# Altium PCB MAX3738ETG+ MEZ.PcbDoc
Units mm, origin at the board's own origin, x right, y up, seen from the top; angles counter-clockwise.
Board outline 80 x 55 mm, 2 copper layers (Top Layer, Bottom Layer); 14 components, 22 nets, 73 pads, 3 vias.
Unrouted connection lines stored in the file: 2.
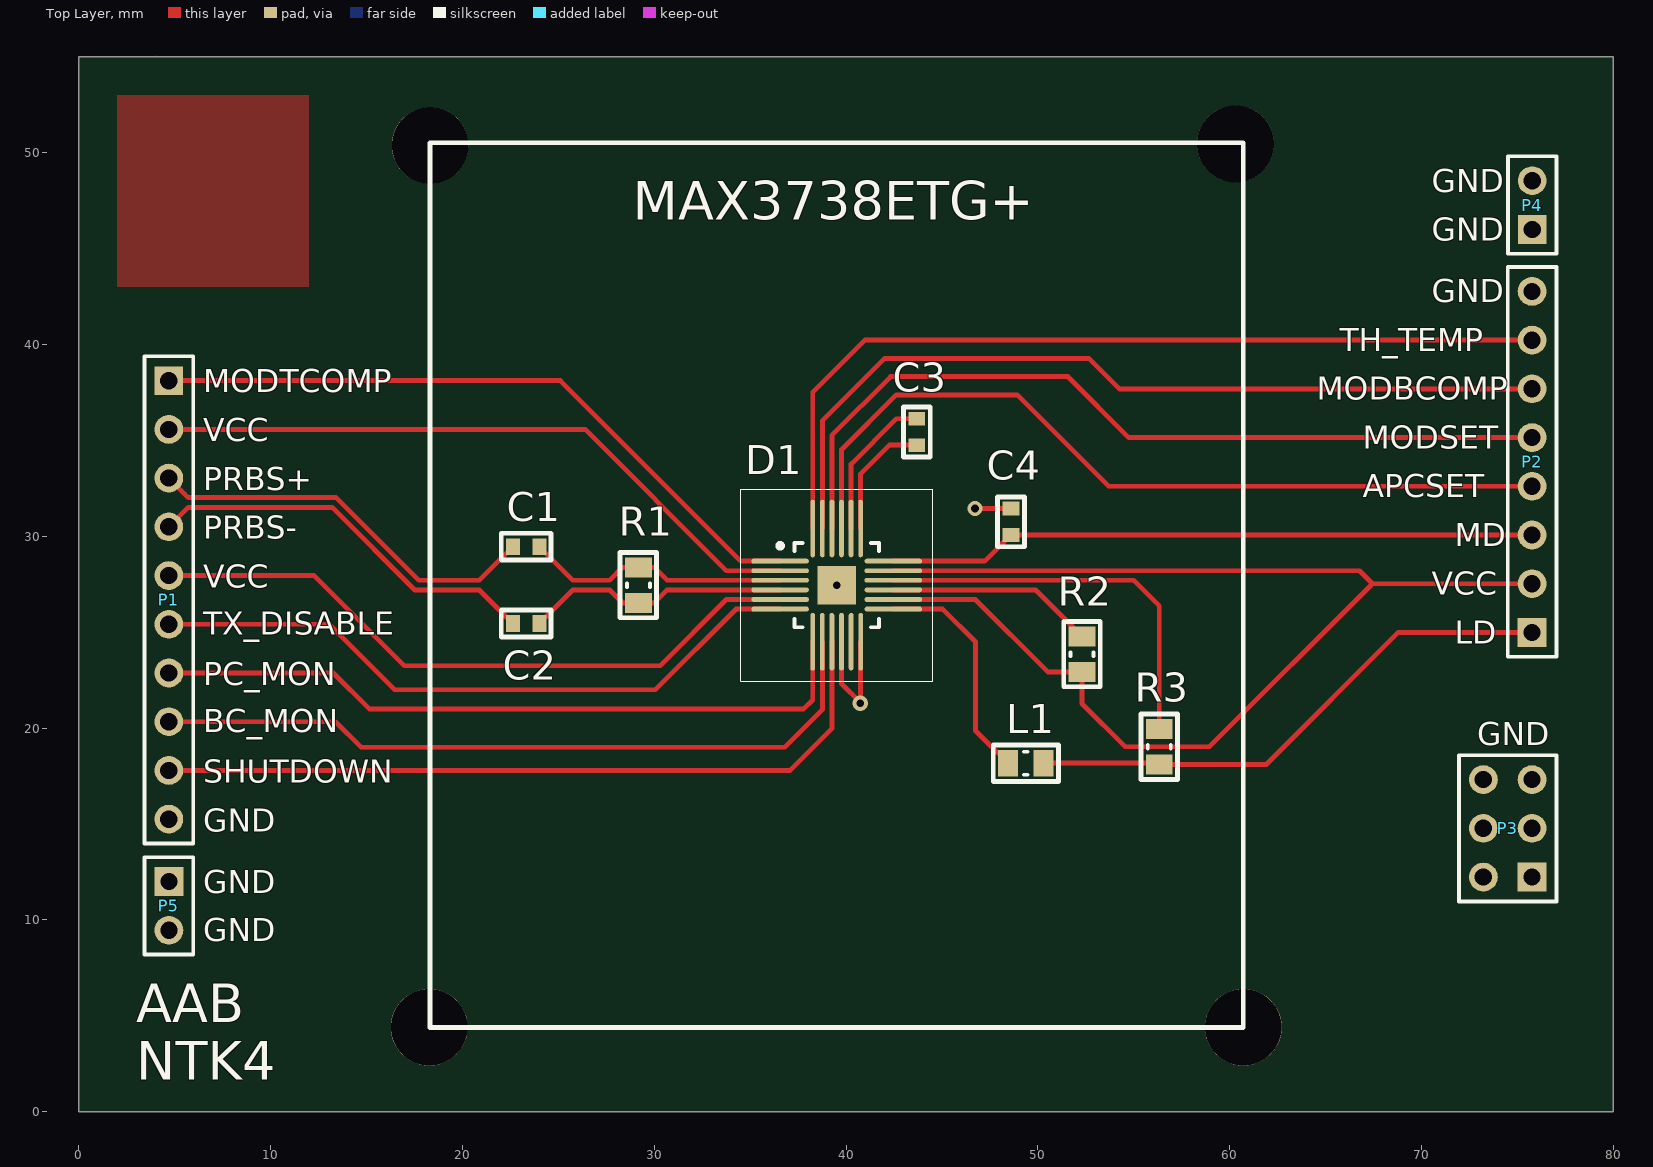
[diagram p0: Top Layer view]
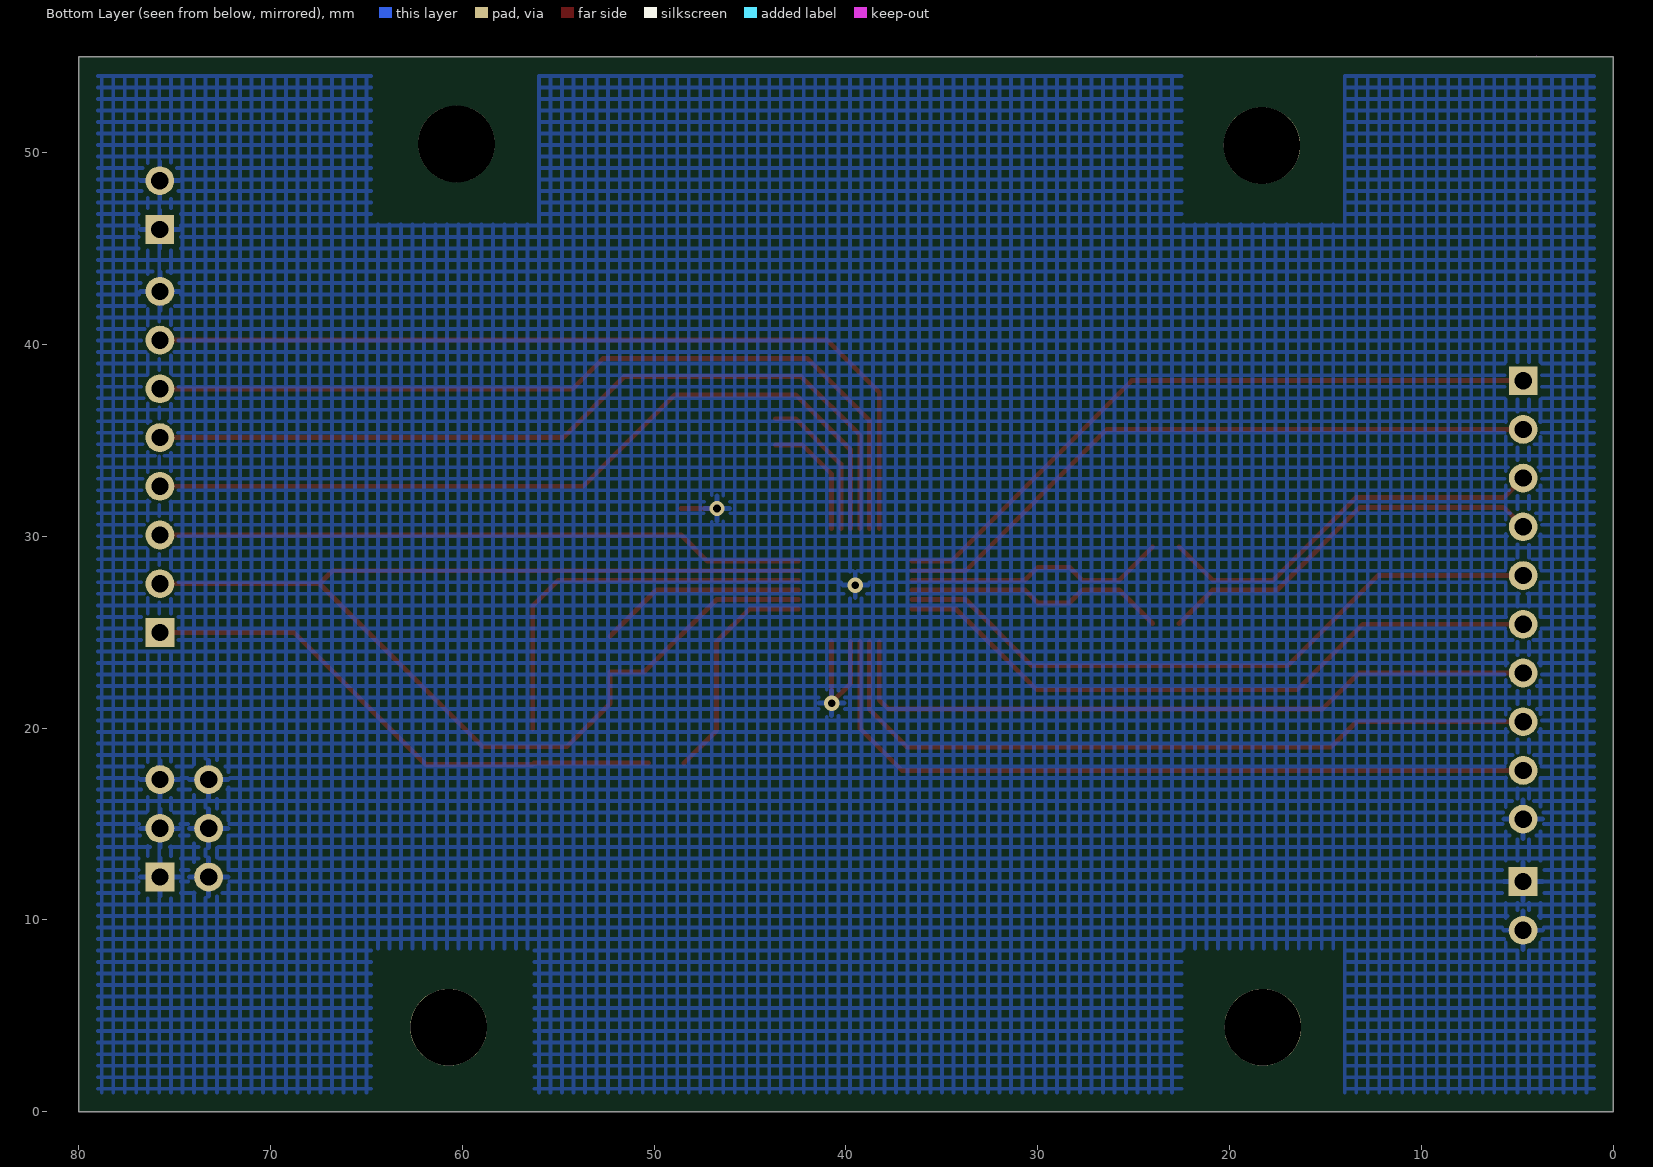
[diagram p1: Bottom Layer view, seen from below]

## Layer stack, top to bottom
Top Solder: solder mask 0.0102, Solder Resist, Dk 3.5
Top Layer: signal copper 0.0356
Dielectric 1: dielectric 0.32, FR-4, Dk 4.8
Bottom Layer: signal copper 0.0356
Bottom Solder: solder mask 0.0102, Solder Resist, Dk 3.5

## Board outline
0,0 80,0 80,55 0,55
cut-out: 4.025,55.075

## Design rules (kind name [scope] priority, off if disabled: settings)
Clearance [All] p1: gap=0.127 ignorepadtopadclearanceinfootprint=FALSE
DiffPairsRouting [All] p1: maxlimit=0.254 minlimit=0.254 mostfreqgap=0.254 toplayer_minwidth=0.254 toplayer_maxwidth=0.254 toplayer_prefwidth=0.254 bottomlayer_minwidth=0.254 bottomlayer_maxwidth=0.254 bottomlayer_prefwidth=0.254 maxuncoupledlength=12.7
PolygonConnect [All] p1: connectstyle=Relief reliefconductorwidth=0.254 reliefentries=4 polygonreliefangle="90 Angle" airgapwidth=0.254
RoutingVias [All] p1: holewidth=0.4 width=0.8 viastyle="Through Hole" minholewidth=0.4 minwidth=0.6 maxholewidth=6 maxwidth=6
SolderMaskExpansion [All] p1: expansion=0.102
UnRoutedNet [All] p1: checkbadconnections=TRUE
Width [All] p1: maxlimit=0.6 minlimit=0.127 preferedwidth=0.254 minimp=50.000000 maximp=50.000000 favimp=50.000000 checkconnectedcopper=TRUE
28 further rules are at their usual default settings.

## Classes and differential pairs
differential pair PRBS: +PRBS_P -PRBS_N
differential pair IN: +IN_P -IN_N

## Components (designator, comment, footprint, x,y, rotation, side; value= is the part's Value field where it differs from the comment)
C1 "0,1 uF_0603" CAP_0603 23.325,29.455 r0 top
C2 "0,1 uF_0603" CAP_0603 23.325,25.455 r0 top
C3 "0,01uF_0603" CAP_0603 43.691,35.439 r90 top
C4 "0,01uF_0603" CAP_0603 48.598,30.758 r90 top
D1 "MAX3738ETG+" MAX3738ETG+ 39.515,27.455 r0 top
L1 "4,7 uH_0805" IND_0805 49.376,18.171 r0 top
P1 "Header 10" HDR1X10 4.697,38.113 r270 top
P2 "Header 8" HDR1X8 75.77,24.987 r90 top
P3 "Header 3X2A" HDR2X3_CEN 75.769,12.234 r90 top
P4 "Header 2" HDR1X2 75.775,46 r90 top
P5 "Header 2" HDR1X2 4.7,12 r270 top
R1 "100 Om_0805" RES_0805 29.175,27.455 r90 top
R2 "15 Om_0805" RES_0805 52.304,23.857 r90 top
R3 "10 Om_0805" RES_0805 56.329,19.029 r90 top

## Footprints (in the part's own frame and the unit in brackets; to place one, negate y for a bottom-side part, rotate by r counter-clockwise, add the part's x,y. Pads: shape width x height; smd on the part's side, far side on the other; paste and mask are expansions set on the pad)
CAP_0603 [mm]
  rect 0.72x0.88 smd: 1(-0.69,0) 2(0.69,0)
  silkscreen extent -1.3,-0.7 1.3,0.7, body extent -0.8,-0.4 0.8,0.4, height 0.9
HDR1X2 [mm] "Connector; Header; 2 Position"
  rect 1.5x1.5 hole 0.9: 1(0,0)
  round 1.5 hole 0.9: 2(2.54,0)
  silkscreen extent -1.27,-1.27 3.81,1.27
HDR1X8 [mm] "Connector; Header; 8 Position"
  rect 1.5x1.5 hole 0.9: 1(0,0)
  round 1.5 hole 0.9: 2(2.54,0) 3(5.08,0) 4(7.62,0) 5(10.16,0) 6(12.7,0) 7(15.24,0) 8(17.78,0)
  silkscreen extent -1.27,-1.27 19.05,1.27
HDR1X10 [mm] "Connector; Header; 10 Position"
  rect 1.5x1.5 hole 0.9: 1(0,0)
  round 1.5 hole 0.9: 2(2.54,0) 3(5.08,0) 4(7.62,0) 5(10.16,0) 6(12.7,0) 7(15.24,0) 8(17.78,0) 9(20.32,0) 10(22.86,0)
  silkscreen extent -1.27,-1.27 24.13,1.27
HDR2X3_CEN [mm] "Connector; Header; 3x2 Position"
  rect 1.5x1.5 hole 0.9: 1(0,0)
  round 1.5 hole 0.9: 2(2.54,0) 3(5.08,0) 4(0,2.54) 5(2.54,2.54) 6(5.08,2.54)
  silkscreen extent -1.27,-1.27 6.35,3.81
IND_0805 [mm]
  rect 1.05x1.4 smd: 1(-0.925,0) 2(0.925,0)
  silkscreen extent -1.7,-0.95 1.7,0.95, body extent -1.1,-0.7 1.1,0.7, height 1
MAX3738ETG+ [mm] "QFN, 24-Leads, Body 4,00x4,00mm, Pitch 0,50mm, Thermal Pad 2,54x2,54mm, IPC Medium Density"
  oval 3x0.25 smd: 1(-2.95,1.25) 2(-2.95,0.75) 3(-2.95,0.25) 4(-2.95,-0.25) 5(-2.95,-0.75) 6(-2.95,-1.25) 13(2.95,-1.25) 14(2.95,-0.75) 15(2.95,-0.25) 16(2.95,0.25) 17(2.95,0.75) 18(2.95,1.25)
  oval 0.25x3 smd: 7(-1.25,-2.95) 8(-0.75,-2.95) 9(-0.25,-2.95) 10(0.25,-2.95) 11(0.75,-2.95) 12(1.25,-2.95) 19(1.25,2.95) 20(0.75,2.95) 21(0.25,2.95) 22(-0.25,2.95) 23(-0.75,2.95) 24(-1.25,2.95)
  rect 2x2 smd: EP(0,0)
  silkscreen extent -5,-5 5,5, body extent -2.05,-2.05 2.05,2.05, height 0.8
RES_0805 [mm]
  rect 1.05x1.4 smd: 1(-0.925,0) 2(0.925,0)
  silkscreen extent -1.7,-0.95 1.7,0.95, body extent -1.1,-0.7 1.1,0.7, height 1

## Part data
C1 C2 C3 C4: library part CAP
L1: library part IND
P1: "Header, 10-Pin", LatestRevisionDate=17-Jul-2002, LatestRevisionNote="Re-released for DXP Platform.", Publisher="Altium Limited"
P2: "Header, 8-Pin", LatestRevisionDate=17-Jul-2002, LatestRevisionNote="Re-released for DXP Platform.", Publisher="Altium Limited"
P3: "Header, 3-Pin, Dual row", LatestRevisionDate=17-Jul-2002, LatestRevisionNote="Re-released for DXP Platform.", Publisher="Altium Limited"
P4 P5: "Header, 2-Pin", LatestRevisionDate=17-Jul-2002, LatestRevisionNote="Re-released for DXP Platform.", Publisher="Altium Limited"
R1 R2 R3: library part RES

## Free pads (board coordinates)
  round 4 hole 4: 0(18.27,4.405) 0(18.321,50.379) 0(60.307,50.455) 0(60.714,4.405)

## Via types
v1: diameter 0.8, hole 0.4, Top Layer to Bottom Layer, 3 vias

## Nets (pads, with @x,y where several pads share a name; then routed paths per layer and width w, separated by ;. In a path a pad name is that pad's centre, name@x,y a point inside that pad or via, vN(x,y) a via of type N, cw(c..) or ccw(c..) an arc to the next point about the centre after c; other vN are vias at no path point)
APCFILT1: C3.1 D1.19 | length 6.4
  Top Layer w0.254: D1.19 40.765,33.25 42.265,34.749 C3.1
APCFILT2: C3.2 D1.20 | length 7.8
  Top Layer w0.254: D1.20 40.265,33.765 42.629,36.129 C3.2
APCSET: D1.21 P2.4 | length 43.3
  Top Layer w0.254: D1.21 39.765,34.515 42.625,37.375 48.925,37.375 53.693,32.607 54,32.607 P2.4
BC_MON: D1.8 P1.8 | length 39
  Top Layer w0.254: P1.8 13.387,20.333 14.72,19 36.8,19 38.765,20.965 D1.8
GND: C4.2 D1.10 D1.12 D1.EP P1.10 P2.8 P3.1 P3.2 P3.3 P3.4 P3.5 P3.6 P4.1 P4.2 P5.1 P5.2 | length 8.7
  Top Layer w0.254: D1.10 39.765,22.315 v1@40.765,21.315 ; v1(40.75,21.3) v1@40.765,21.315 ; D1.12 v1@40.765,21.315 ; v1(46.725,31.45) 46.727,31.448 C4.2
  other v1: 39.515,27.455
IN_N: C2.2 D1.4 R1.1 | length 13.8
  Top Layer w0.254: C2.2 25.761,27.201 27.677,27.201 28.348,26.53 R1.1 30.002,26.53 30.677,27.205 D1.4
IN_P: C1.2 D1.3 R1.2 | length 13.8
  Top Layer w0.254: C1.2 25.761,27.709 27.677,27.709 28.348,28.38 R1.2 30.002,28.38 30.677,27.705 D1.3
LD: L1.2 P2.1 R3.1 | length 28.3
  Top Layer w0.254: L1.2 56.262,18.171 R3.1 61.917,18.104 68.8,24.987 P2.1
MD: C4.1 D1.18 P2.3 | length 33.9
  Top Layer w0.254: D1.18 47.235,28.705 C4.1 P2.3
MODBCOMP: D1.23 P2.6 | length 44.6
  Top Layer w0.254: D1.23 38.765,36.015 42.025,39.275 52.662,39.275 54.25,37.687 P2.6
MODSET: D1.22 P2.5 | length 43.9
  Top Layer w0.254: D1.22 39.265,35.265 42.325,38.325 51.572,38.325 54.75,35.147 P2.5
MODTCOMP: D1.1 P1.1 | length 35.7
  Top Layer w0.254: P1.1@4.725,38.113 21.025,38.113 25.107,38.113 34.515,28.705 D1.1
NetD1_13: D1.13 L1.1 | length 12
  Top Layer w0.254: D1.13 45.045,26.205 46.75,24.5 46.75,19.872 L1.1
OUT+: D1.16 R3.2 | length 20.8
  Top Layer w0.254: D1.16 54.995,27.705 56.329,26.371 R3.2
OUT-: D1.15 R2.2 | length 10.8
  Top Layer w0.254: D1.15 49.881,27.205 R2.2
PC_MON: D1.7 P1.7 | length 37.6
  Top Layer w0.254: P1.7 13.272,22.873 15.145,21 37.8,21 38.265,21.465 D1.7
PRBS_N: C2.1 P1.4 | length 20.9
  Top Layer w0.254: P1.4 5.713,31.509 13.211,31.509 17.519,27.201 20.889,27.201 C2.1
PRBS_P: C1.1 P1.3 | length 20.9
  Top Layer w0.254: P1.3 5.713,32.017 13.422,32.017 17.73,27.709 20.889,27.709 C1.1
SHUTDOWN: D1.9 P1.9 | length 40
  Top Layer w0.254: P1.9 34.793,17.793 37.093,17.793 39.265,19.965 D1.9
TH_TEMP: D1.24 P2.7 | length 45.7
  Top Layer w0.254: D1.24 38.265,37.515 40.977,40.227 P2.7
TX_DISABLE: D1.6 P1.6 | length 35
  Top Layer w0.254: P1.6 13.057,25.413 16.47,22 30.06,22 34.265,26.205 D1.6
VCC: D1.2 D1.5 D1.14 D1.17 P1.2 P1.5 P2.2 R2.1 | length 136.4
  Top Layer w0.254: P1.5 12.267,27.953 16.97,23.25 30.31,23.25 33.765,26.705 D1.5 ; P1.2 24.975,35.573 26.397,35.573 33.765,28.205 D1.2 ; D1.14 46.745,26.705 50.518,22.932 R2.1 52.304,21.271 54.55,19.025 58.948,19.025 67.45,27.527 ; D1.17 66.772,28.205 67.45,27.527 ; P2.2 67.45,27.527
pads on no net: D1.11

## Polygon pours and split planes (outlines as drawn)
GND on Bottom Layer "GND_L02_P170" (hatched 90Degree grid 0.6 track 0.2, pour order 170): 1,54 14,54 14,46.25 22.5,46.25 22.5,54 56,54 56,46.25 64.75,46.25 64.75,54 79,54 79,1 64.75,1 64.75,8.5 56.25,8.5 56.25,1 22.5,1 22.5,8.5 14,8.5 14,1 1,1
GND on Bottom Layer "GND_L02_P160" (hatched 90Degree grid 0.75 track 0.254, remove dead copper, pour order 160): 2,56
APCFILT2 on Bottom Layer "APCFILT2_L02_P148" (hatched 90Degree grid 0.75 track 0.254, remove dead copper, pour order 148): 14,54
APCFILT2 on Bottom Layer "APCFILT2_L02_P146" (hatched 90Degree grid 0.75 track 0.254, remove dead copper, pour order 146): 14,54
no net on Bottom Layer "NONET_L02_P136" (hatched 90Degree grid 0.6 track 0.2, pour order 136): 0,55
GND on Bottom Layer "GND_L02_P128" (hatched 90Degree grid 0.508 track 0.203, pour order 128): 0,55
GND on Bottom Layer "GND_L02_P074" (hatched 90Degree grid 0.508 track 0.203, remove dead copper, pour order 74): 0,55
GND on Bottom Layer "GND_L02_P064" (hatched 90Degree grid 0.508 track 0.203, remove dead copper, pour order 64): 56,46.5
no net on Bottom Layer "NONET_L02_P056" (hatched 90Degree grid 0.508 track 0.203, remove dead copper, pour order 56): 0,55
no net on Bottom Layer "NONET_L02_P008" (hatched 45Degree grid 0.508 track 0.203, remove dead copper, pour order 8): 6.5,52.5
no net on Bottom Layer "NONET_L02_P002" (hatched 45Degree grid 0.508 track 0.203, remove dead copper, pour order 2): 9,50
no net on Bottom Layer "NONET_L02_P000" (hatched 45Degree grid 0.508 track 0.203, remove dead copper, pour order 0): 29,57.5
no net on Top Layer "NONET_L01_P126" (solid, pour order 126): 2,53 12,53 12,43 2,43
no net on Top Layer "NONET_L01_P124" (solid, pour order 124): 2,53
no net on Top Layer "NONET_L01_P118" (solid, remove dead copper, pour order 118): 7,52
no net on Top Layer "NONET_L01_P110" (solid, remove dead copper, pour order 110): 3,52
no net on Top Layer "NONET_L01_P098" (hatched 90Degree grid 0.508 track 0.203, remove dead copper, pour order 98): -3,52
no net on Top Layer "NONET_L01_P092" (hatched 90Degree grid 0.508 track 0.203, remove dead copper, pour order 92): 1.25,54
no net on Top Layer "NONET_L01_P086" (hatched 90Degree grid 0.508 track 0.203, remove dead copper, pour order 86): 2.75,53.25
no net on Top Layer "NONET_L01_P082" (hatched 90Degree grid 0.508 track 0.203, remove dead copper, pour order 82): 1.25,54.25
no net on Top Layer "NONET_L01_P080" (hatched 90Degree grid 0.508 track 0.203, remove dead copper, pour order 80): 1,54.25
no net on Top Layer "NONET_L01_P078" (hatched 90Degree grid 0.508 track 0.203, remove dead copper, pour order 78): 0,55
no net on Top Layer "NONET_L01_P076" (hatched 90Degree grid 0.508 track 0.203, remove dead copper, pour order 76): 0,55

## Silkscreen, mask and mechanical layers (free items; w line width, h text height)
Top Overlay:
  lines w0.254: 18.319,43.5 18.319,4.395 28.917,4.395 50.113,4.395 60.712,4.395 60.712,15.925 60.712,38.985 60.712,50.515 50.113,50.515 44.814,50.515 42.165,50.515 36.866,50.515 34.216,50.515 28.917,50.515 18.319,50.515 18.319,43.515
  text "GND" at 70.548,47.925 h1.2
  text "MAX3738ETG+" at 28.871,46.496 h2
  text "GND" at 70.548,45.4 h1.2
  text "GND" at 70.548,42.2 h1.2
  text "TH_TEMP" at 65.75,39.657 h1.2
  text "MODTCOMP" at 6.5,37.5 h1.2
  text "MODBCOMP" at 64.55,37.114 h1.2
  text "VCC" at 6.5,34.956 h1.2
  text "MODSET" at 66.949,34.571 h1.2
  text "PRBS+" at 6.5,32.411 h1.2
  text "APCSET" at 66.949,32.029 h1.2
  text "PRBS-" at 6.5,29.867 h1.2
  text "MD" at 71.748,29.486 h1.2
  text "VCC" at 6.5,27.322 h1.2
  text "VCC" at 70.548,26.943 h1.2
  text "TX_DISABLE" at 6.5,24.878 h1.2
  text "LD" at 71.748,24.4 h1.2
  text "PC_MON" at 6.5,22.233 h1.2
  text "BC_MON" at 6.5,19.789 h1.2
  text "GND" at 72.898,19.1 h1.2
  text "SHUTDOWN" at 6.5,17.144 h1.2
  text "GND" at 6.5,14.6 h1.2
  text "GND" at 6.5,11.4 h1.2
  text "GND" at 6.5,8.875 h1.2
  text "AAB / NTK4" at 3,1.671 h2
Mechanical 1:
  the board outline again, w0.254